# EAGLE board Tally Box (EAGLE 9.4.2)
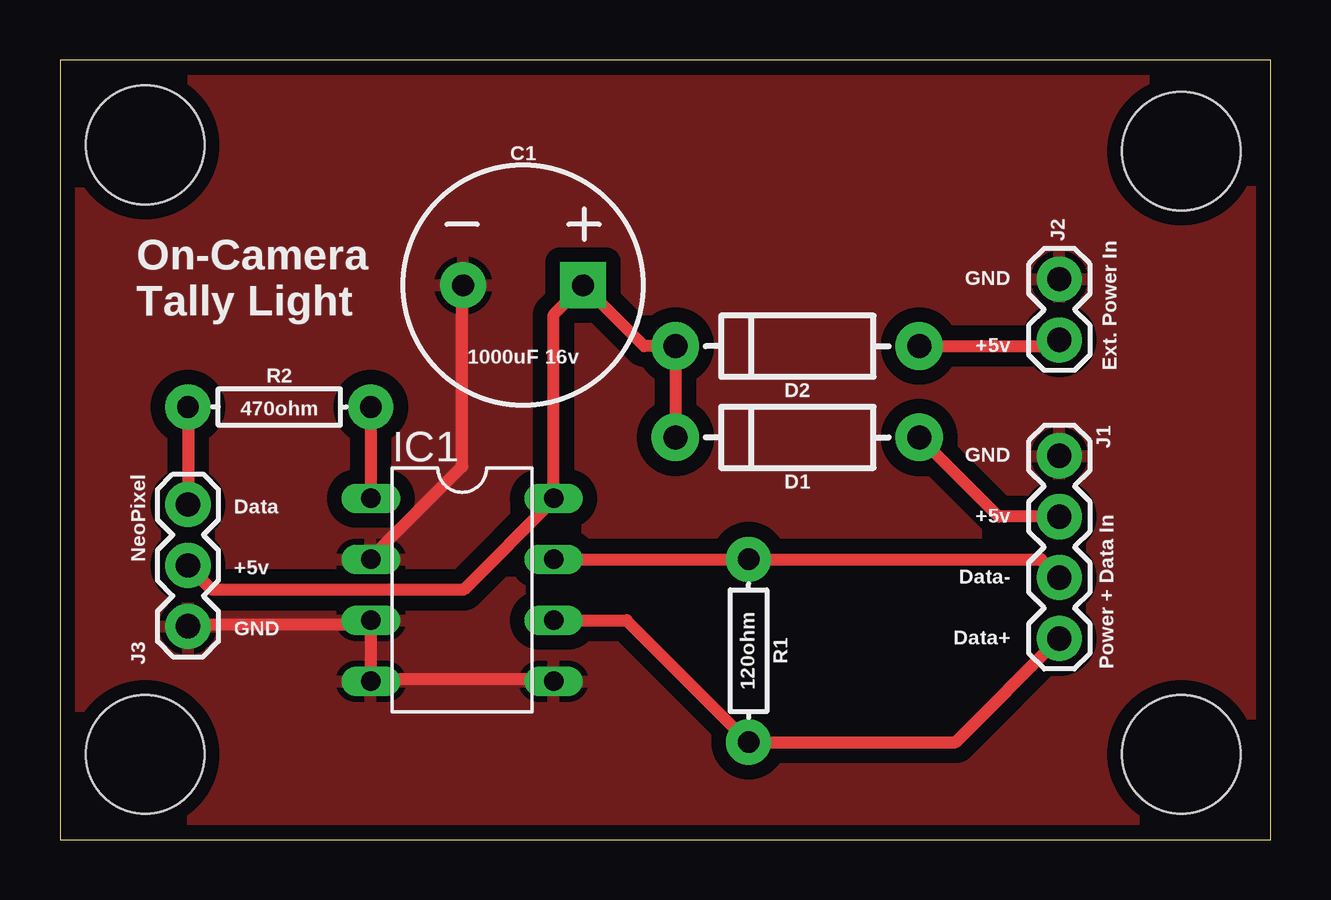
[diagram p0: board, top side]
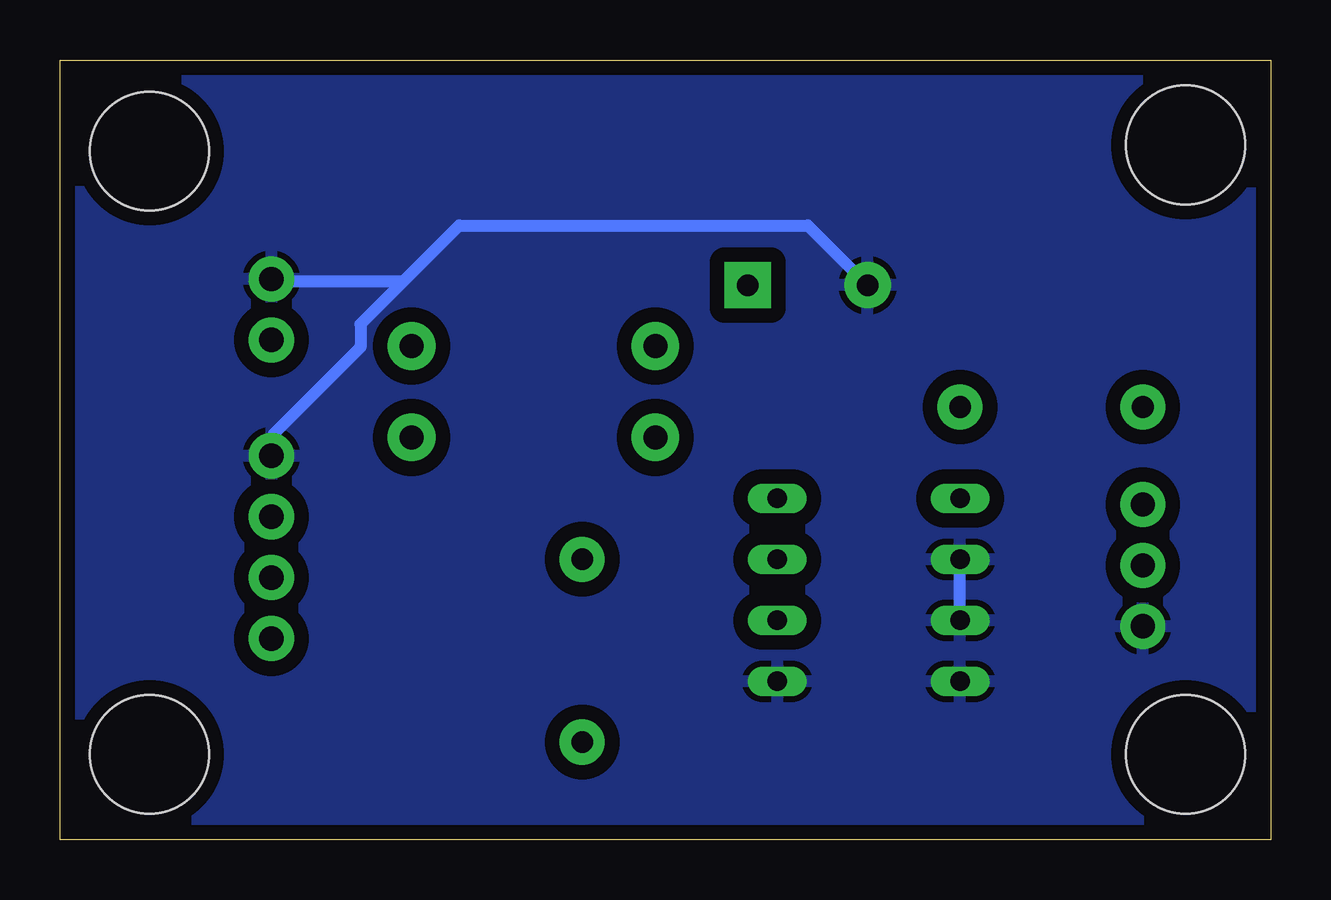
[diagram p1: board, bottom side, seen from below]

Size 50.47 x 32.5 mm. Coordinates in mm from the lower left corner, seen from the top.
Outline: 0,0 50.47,0 50.47,32.5 0,32.5 0,0
Copper layers (1*16): Top 0.035559375mm / dielectric 1.6mm / Bottom 0.035559375mm
Design rules "oshpark-2layer": minimum track width 6mil, minimum drill 10mil, track to track 6mil, track to pad 6mil, pad to pad 6mil, via to via 6mil, smd to smd 6mil, copper to edge 15mil, drill to drill 6mil, minimum pad ring 5mil, minimum via ring 5mil, stop-mask expansion 2.5mil, vias tented up to drill 0mil, thermal gap 10mil
Holes 4.95 mm at 46.74,28.7 46.74,3.56 3.56,3.56 3.56,28.96

## Footprints (pad centres in the part's own frame; a part is rotated, then mirrored left to right if it is on the bottom)
CPOL-RADIAL-5MM-10MM = drill 0.9 pad 1.93 square: + 2.5,0 | drill 0.9 pad 1.93: - -2.5,0
DIODE-1N4001 = drill 1 pad 1.981: A -5.08,0; C 5.08,0
DIL08 = drill 0.813 long: 1 -3.81,-3.81; 2 -1.27,-3.81; 3 1.27,-3.81; 4 3.81,-3.81; 5 3.81,3.81; 6 1.27,3.81; 7 -1.27,3.81; 8 -3.81,3.81
1X04 = drill 1.016 pad 1.88: 1 0,0; 2 2.54,0; 3 5.08,0; 4 7.62,0
1X02 = drill 1.016 pad 1.88: 1 0,0; 2 2.54,0
1X03 = drill 1.016 pad 1.88: 1 0,0; 2 2.54,0; 3 5.08,0
AXIAL-0.3 = drill 0.9 pad 1.88: P$1 -3.81,0; P$2 3.81,0

## Placement (x,y rotation side)
C1  1000uF 16v  [CPOL-RADIAL-5MM-10MM]  19.3,23.11 0 top
D1  [DIODE-1N4001]  30.73,16.76 180 top
D2  [DIODE-1N4001]  30.73,20.57 180 top
IC1  75176AP  [DIL08]  16.76,10.41 270 top
J1  Power + Data In  [1X04]  41.66,16 270 top
J2  Ext. Power In  [1X02]  41.66,23.37 270 top
J3  NeoPixel  [1X03]  5.33,8.89 90 top
R1  120ohm  [AXIAL-0.3]  28.7,7.87 270 top
R2  470ohm  [AXIAL-0.3]  9.14,18.03 0 top

## Library data of the parts
C1 = SparkFun-Capacitors; PROD_ID: CAP-09538
D1 D2 = SparkFun-DiscreteSemi; PROD_ID: DIO-09176
IC1 = 751xx
J1 = SparkFun-Connectors; PROD_ID: CONN-09696
J2 = SparkFun-Connectors
J3 = SparkFun-Connectors; PROD_ID: XXX-00000
R1 R2 = SparkFun-Resistors

## Nets
DATA: J3.3 R2.P$1
DATA+: IC1.6 J1.4 R1.P$2
DATA-: IC1.7 J1.3 R1.P$1
DATAOUT: IC1.1 R2.P$2
GND: C1.- IC1.2 IC1.3 IC1.4 IC1.5 J1.1 J2.1 J3.1
VCC: C1.+ D1.C D2.C IC1.8 J3.2
VIN1: D1.A J1.2
VIN2: D2.A J2.2

## Tracks (layer width: path | path; a pad name or v marks a point on that pad's centre or on a via)
DATA
  Top 0.508: R2.P$1 J3.3
DATA+
  Top 0.508: IC1.6 23.62,9.14 R1.P$2 37.34,4.06 J1.4
DATA-
  Top 0.508: IC1.7 R1.P$1 40.89,11.68 J1.3
DATAOUT
  Top 0.508: R2.P$2 IC1.1
GND
  Top 0.508: IC1.3 12.95,8.94 | 12.95,8.94 12.95,6.71 | 12.95,6.71 20.57,6.71 IC1.5 | 12.95,6.71 IC1.4 | 12.95,8.94 5.33,8.94 J3.1 | C1.- 16.76,23.01 16.76,15.54 12.95,11.73 IC1.2
  Bottom 0.508: J1.1 41.55,16 41.55,16.92 37.95,20.52 37.95,21.49 36.17,23.27 | J2.1 41.6,23.27 36.17,23.27 | IC1.3 IC1.2 | 36.17,23.27 33.83,25.6 19.29,25.6 C1.-
  pour Top (isolate 0.61): 0,32.51 50.8,32.51 50.8,0 0,0
  pour Bottom (isolate 0.61): 0,32.51 50.8,32.51 50.8,0 0,0
VCC
  Top 0.508: J3.2 6.35,10.41 16.82,10.41 20.57,14.17 IC1.8 20.57,21.88 C1.+ 24.34,20.57 D2.C D1.C
VIN1
  Top 0.508: J1.2 39.12,13.46 D1.A
VIN2
  Top 0.508: D2.A 41.4,20.57 J2.2

## Text on the board
tNames: On-Camera / Tally Light | GND | +5v | GND | Data | +5v | +5v | Data- | GND | Data+